# Altium PCB ArduinoSTM32.PcbDoc
Units mm, origin at the board's own origin, x right, y up, seen from the top; angles counter-clockwise.
Board outline 152.4 x 101.6 mm, 2 copper layers (Top Layer, Bottom Layer), stack 0.325 mm thick; 73 components, 61 nets, 247 pads, 39 vias.
Unrouted connection lines stored in the file: 17.
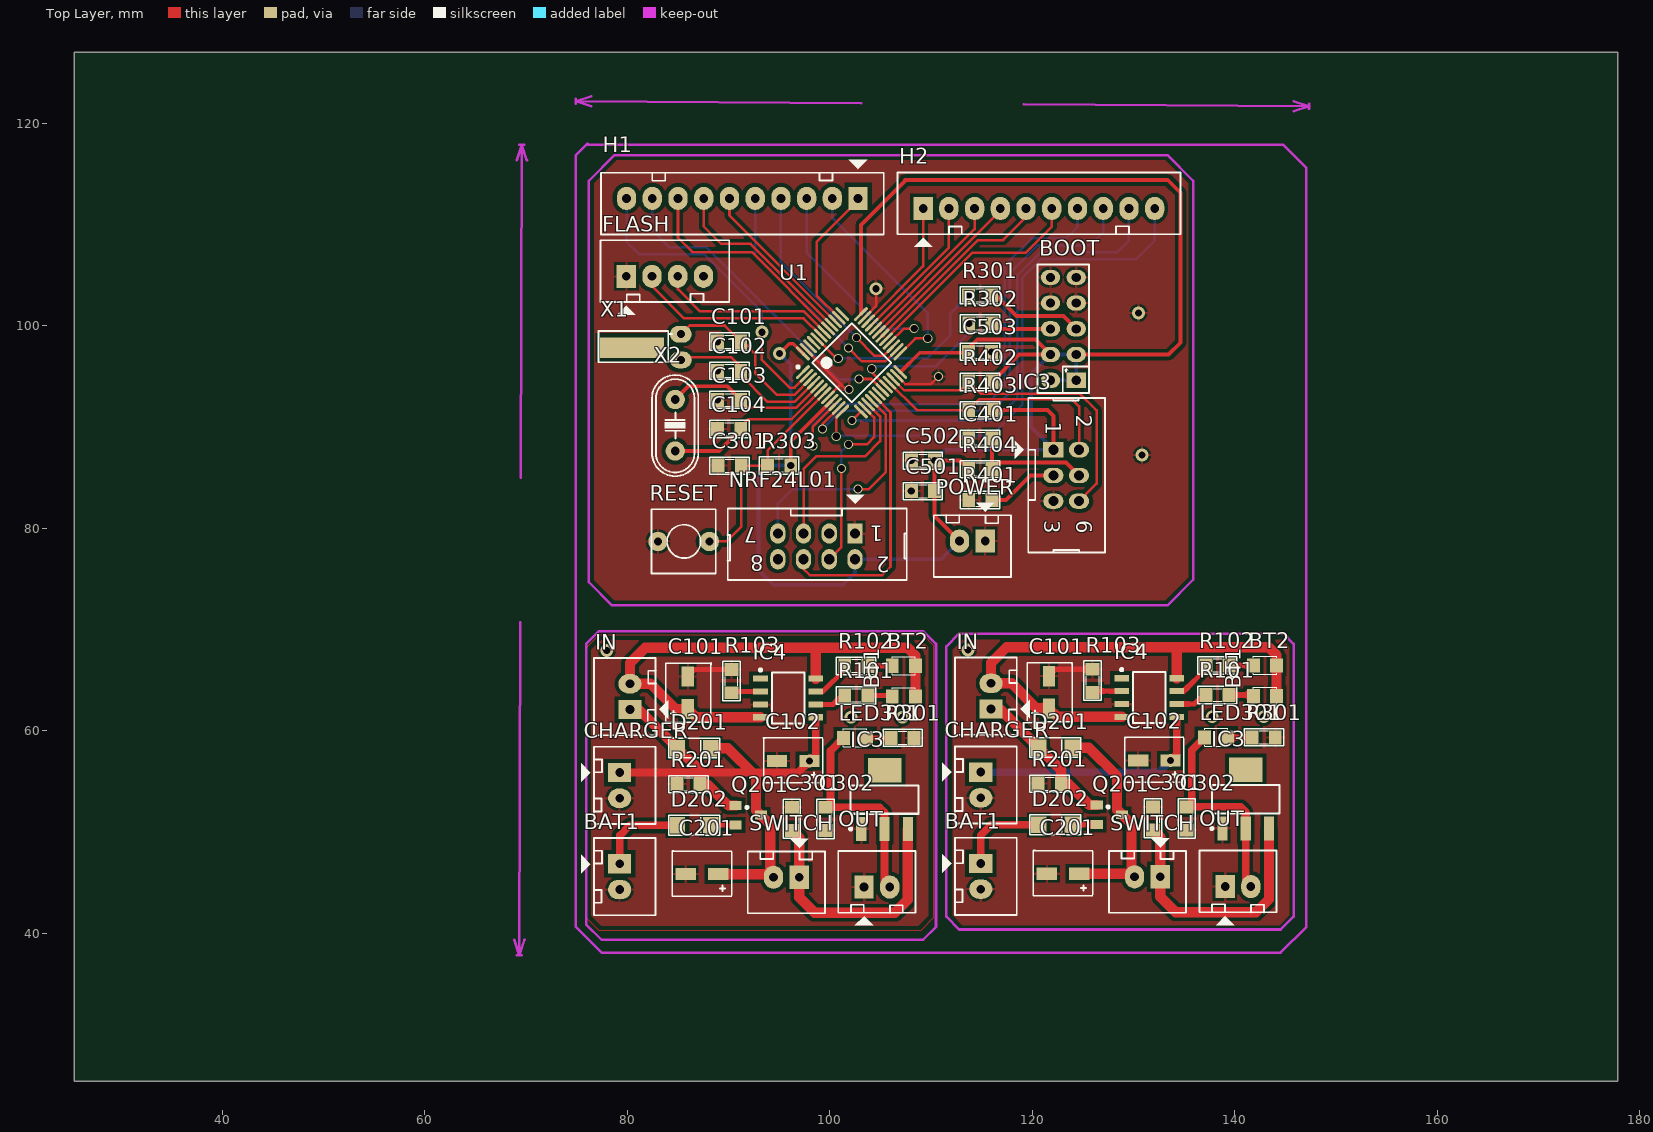
[diagram p0: Top Layer view]
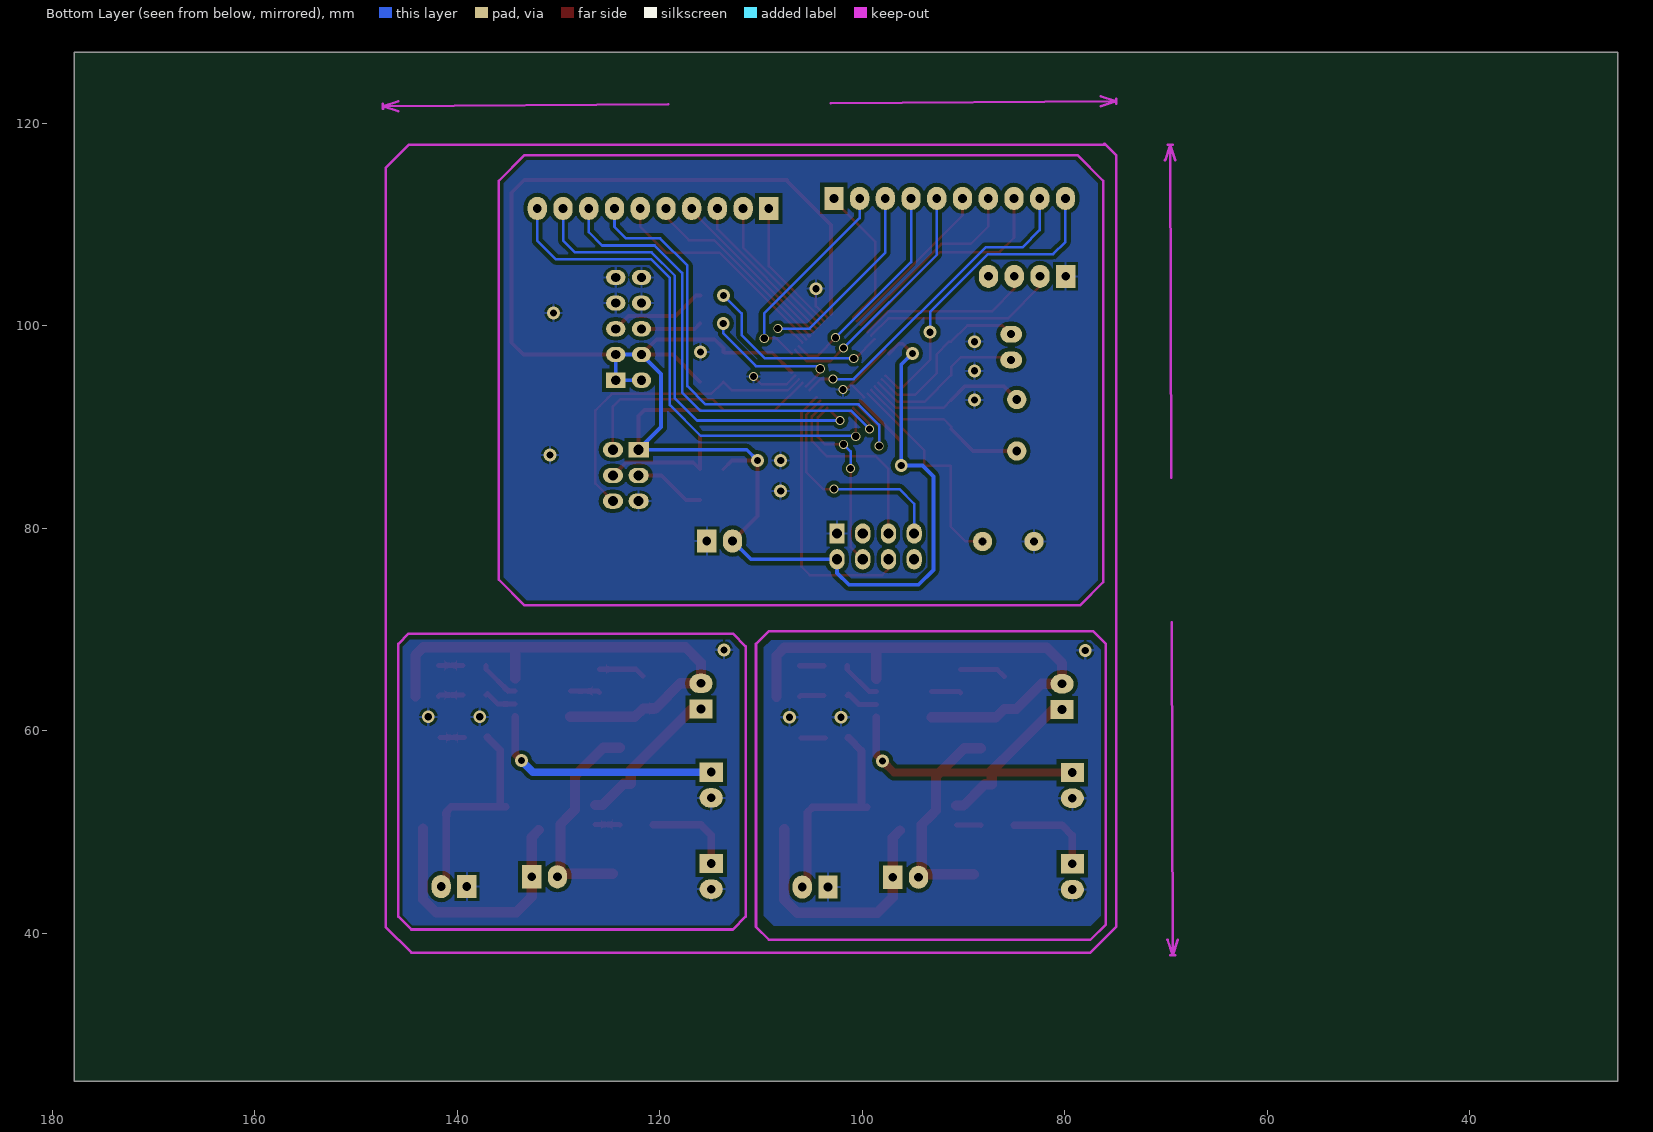
[diagram p1: Bottom Layer view, seen from below]
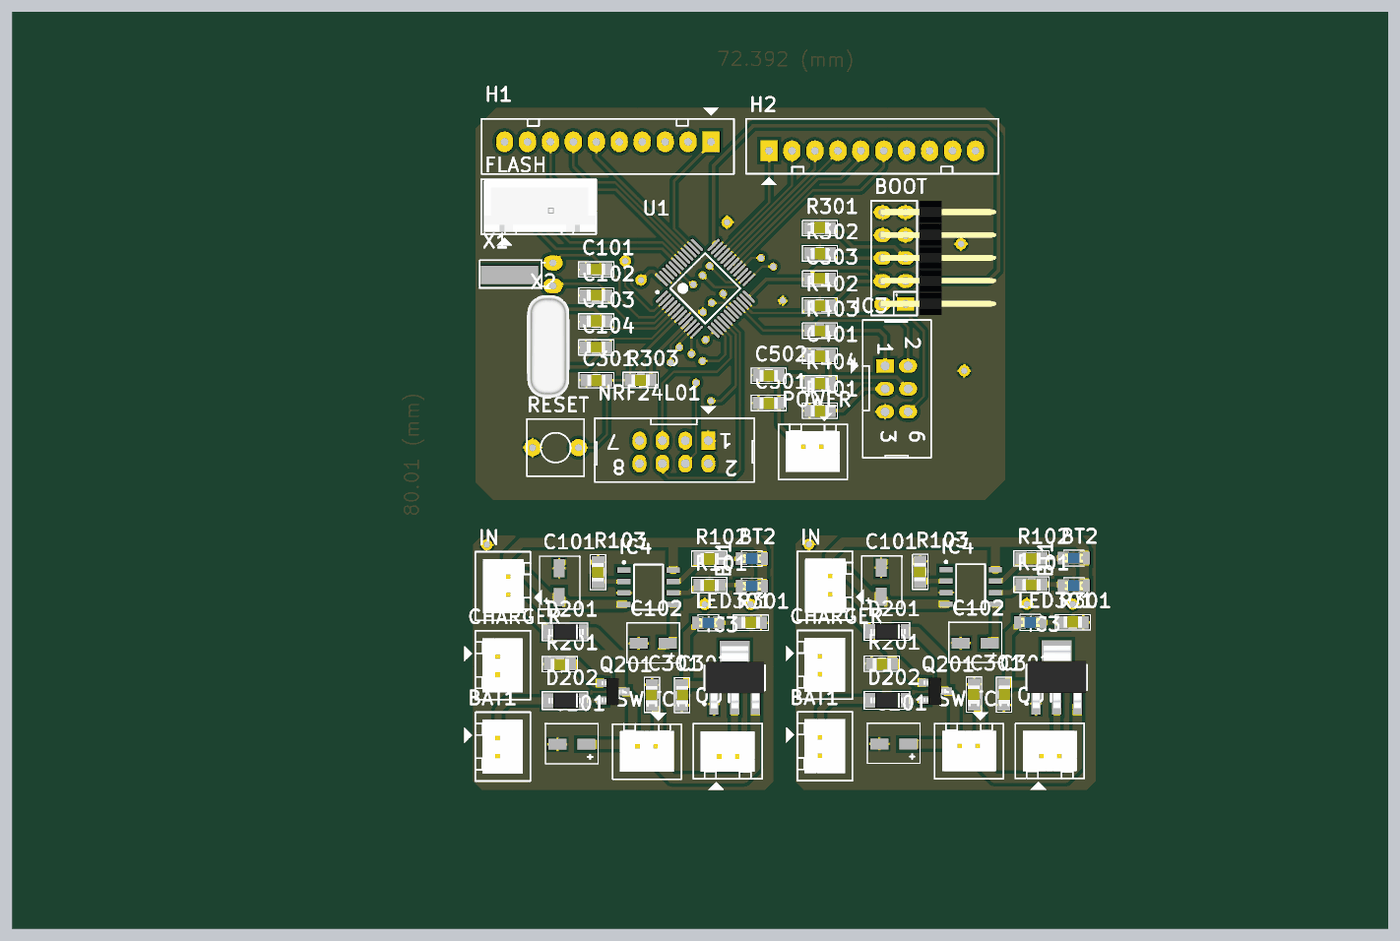
[diagram p2: 3D render of the assembled board from above, using the file's embedded part models]

## Layer stack, top to bottom
Top Layer: signal copper 0.0356
Dielectric 1: core 0.254, FR-4, Dk 4.2
Bottom Layer: signal copper 0.0356

## Board outline
25.4,25.4 177.8,25.4 177.8,127 25.4,127

## Design rules (kind name [scope] priority, off if disabled: settings)
Clearance [All] p1: gap=0.381
PolygonConnect [All] p1: connectstyle=Relief reliefconductorwidth=0.254 reliefentries=4 polygonreliefangle="90 Angle" airgapwidth=0.254
RoutingVias [All] p1: holewidth=0.711 width=1.27 viastyle="Through Hole" minholewidth=0.711 minwidth=1.27 maxholewidth=0.711 maxwidth=1.27
SolderMaskExpansion [All] p1: expansion=0.102
Width VCC_3.3 [InNet('VCC_3.3V')] p1: maxlimit=0.762 minlimit=0.381 preferedwidth=0.762
Width VCC_5 [InNet('VCC_5V')] p2: maxlimit=1.016 minlimit=1.016 preferedwidth=1.016
Width [All] p3: maxlimit=0.381 minlimit=0.254 preferedwidth=0.381
30 further rules are at their usual default settings.

## Components (designator, comment, footprint, x,y, rotation, side; value= is the part's Value field where it differs from the comment)
BAT1 "JP2" CON2 79.248,46.863 r270 top
BAT1 "JP2" CON2 114.907,46.906 r270 top
BOOT "Header 5x2" HED2X5_cen 124.333,94.615 r90 top
BT1 "LED" LED0805-Blue 108.458,63.373 r180 top
BT1 "LED" LED0805-Blue 144.117,63.416 r180 top
BT2 "LED" LED0805-Blue 108.458,66.421 r180 top
BT2 "LED" LED0805-Blue 144.117,66.464 r180 top
C101 "10uF/16V" CAP-B-22UF/16V 85.979,63.754 r90 top
C101 "103" SM-0805 90.068,98.425 r180 top
C101 "10uF/16V" CAP-B-22UF/16V 121.638,63.797 r90 top
C102 "10uF/16V" CAP-B-22UF/16V 96.393,57.023 r180 top
C102 "103" SM-0805 90.068,95.546 r180 top
C102 "10uF/16V" CAP-B-22UF/16V 132.052,57.066 r180 top
C103 "103" SM-0805 90.068,92.668 r180 top
C104 "104" SM-0805 90.068,89.789 r180 top
C201 "10uF/16V" CAP-B-22UF/16V 87.376,45.847 r180 top
C201 "10uF/16V" CAP-B-22UF/16V 123.035,45.89 r180 top
C301 "103" SM-0805 96.266,51.308 r270 top
C301 "103" SM-0805 90.119,86.182 r0 top
C301 "103" SM-0805 131.925,51.351 r270 top
C302 "103" SM-0805 99.568,51.308 r90 top
C302 "103" SM-0805 135.227,51.351 r90 top
C401 "104" SM-0805 114.859,88.862 r0 top
C501 "104" SM-0805 109.195,83.668 r0 top
C502 "104" SM-0805 109.195,86.69 r0 top
C503 "104" SM-0805 114.833,97.409 r180 top
CHARGER "JP2" CON2 79.248,55.88 r270 top
CHARGER "JP2" CON2 114.907,55.923 r270 top
D201 "3V3" Diode1206 86.614,58.293 r0 top
D201 "3V3" Diode1206 122.273,58.336 r0 top
D202 "3V3" Diode1206 86.614,50.673 r0 top
D202 "3V3" Diode1206 122.273,50.716 r0 top
FLASH "JP4" CON4 79.908,104.877 r0 top
H1 "JP10" CON10 102.794,112.573 r180 top
H2 "JP10" CON10 109.22,111.582 r0 top
IC3 "LM1117" SOT223-4N 105.41,53.213 r90 top
IC3 "BH1750" BH1750 122.072,87.757 r270 top
IC3 "LM1117" SOT223-4N 141.069,53.256 r90 top
IC4 "TP4056-1A" TP4056-1A 95.885,63.246 r0 top
IC4 "TP4056-1A" TP4056-1A 131.544,63.289 r0 top
IN "H1" CON2 80.264,62.103 r90 top
IN "H1" CON2 115.923,62.146 r90 top
LED301 "POWER" LED0805-Blue 101.346,59.309 r0 top
LED301 "POWER" LED0805-Blue 137.005,59.352 r0 top
NRF24L01 "NRF24L01" NRF24L01 102.489,79.477 r180 top
OUT "H2" CON2 103.378,44.577 r0 top
OUT "H2" CON2 139.037,44.62 r0 top
POWER "JP2" CON2 115.341,78.74 r180 top
Q201 "IRF9540" SOT23A 91.948,51.689 r270 top
Q201 "IRF9540" SOT23A 127.607,51.732 r270 top
R101 "330" SM-0805 102.616,63.5 r0 top
R101 "330" SM-0805 138.275,63.543 r0 top
R102 "330" SM-0805 102.616,66.421 r0 top
R102 "330" SM-0805 138.275,66.464 r0 top
R103 "1k" SM-0805 90.297,64.897 r270 top
R103 "1k" SM-0805 125.956,64.94 r270 top
R201 "10K" SM-0805 86.055,54.737 r0 top
R201 "10K" SM-0805 121.714,54.78 r0 top
R301 "330" SM-0805 107.188,59.309 r180 top
R301 "100k" SM-0805 114.833,102.997 r180 top
R301 "330" SM-0805 142.847,59.352 r180 top
R302 "100k" SM-0805 114.859,100.228 r0 top
R303 "1k" SM-0805 94.996,86.208 r0 top
R401 "1k" SM-0805 114.859,82.804 r0 top
R402 "4.7k" SM-0805 114.859,94.463 r0 top
R403 "4.7k" SM-0805 114.859,91.675 r0 top
R404 "1k" SM-0805 114.859,85.833 r0 top
RESET "SW" SW2 88.113,78.702 r180 top
SWITCH "JP2" CON2 96.977,45.542 r180 top
SWITCH "JP2" CON2 132.636,45.585 r180 top
U1 "STM32F103C8T6" TQFP48_N 102.159,96.342 r45 top
X1 "32.768Khz" XT32kn 85.293,99.162 r180 top
X2 "4Mhz" XT2 84.734,90.17 r90 top

## Footprints (in the part's own frame and the unit in brackets; to place one, negate y for a bottom-side part, rotate by r counter-clockwise, add the part's x,y. Pads: shape width x height; smd on the part's side, far side on the other; paste and mask are expansions set on the pad)
BH1750 [mm] "BH1750 3x2,20 pin, connecter"
  rect 1.5x2 hole 1: 1(0,0)
  oval 1.5x2 hole 1: 2(2.54,0) 3(5.08,0) 4(0,2.54) 5(2.54,2.54) 6(5.08,2.54)
  silkscreen extent -5.1,-3.81 10.16,5.1
CAP-B-22UF/16V [mm]
  rect 2x1.2 smd: 1(-1.6,0) 2(1.6,0)
  silkscreen extent -2.92,-2.29 2.92,2.16
CON2 [mil] "CON2"
  rect 75x90 hole 34: 1(0,0)
  oval 75x90 hole 34: 2(100,0)
  silkscreen extent -100,-150 200,140, body extent -68,-70 168,107, height 236
CON4 [mil] "CON4"
  rect 75x90 hole 34: 1(0,0)
  oval 75x90 hole 34: 2(100,0) 3(200,0) 4(300,0)
  silkscreen extent -100,-150 400,140, body extent -90,-90 398,136, height 276
CON10 [mil] "CON10"
  rect 75x90 hole 34: 1(0,0)
  oval 75x90 hole 34: 2(100,0) 3(200,0) 4(300,0) 5(400,0) 6(500,0) 7(600,0) 8(700,0) 9(800,0) 10(900,0)
  silkscreen extent -100,-150 1000,140
Diode1206 [mil]
  rect 60x65 smd: 1(-65,0) 2(65,0)
  silkscreen extent -99,-38 99,39, body extent -72,-35 82,35, height 46
HED2X5_cen [mm] "Connector; Header; 5x2 Position"
  rect 1.5x1.9 hole 0.9: 1(0,0)
  oval 1.5x1.9 hole 0.9: 2(2.54,0) 3(5.08,0) 4(7.62,0) 5(10.16,0) 6(0,2.54) 7(2.54,2.54) 8(5.08,2.54) 9(7.62,2.54) 10(10.16,2.54)
  silkscreen extent -1.27,-1.27 11.43,3.81, body extent -1.24,-10.02 11.46,2.86, height 5.02
LED0805-Blue [mil]
  rect 50x55 smd: 1(0,0) 2(90,0)
  silkscreen extent 0,-35 90,35, body extent 5,-25 85,25, height 43
NRF24L01 [mm] "NRF24L01 4x2 pin, connector"
  rect 1.5x2 hole 1: 1(0,0)
  oval 1.5x2 hole 1: 2(0,2.54) 3(2.54,0) 4(2.54,2.54) 5(5.08,0) 6(5.08,2.54) 7(7.62,0) 8(7.62,2.54)
  silkscreen extent -5.1,-3.81 12.6,4.57
SM-0805 [mil] "Compoment SMD 80x50mil"
  rect 50x55 smd: 1(-45,0) 2(45,0)
  silkscreen extent -77,-34 76,33, body extent -40,-27 40,23, height 24
SOT23A [mm] "SOT 23A"
  rect 0.85x1.2 smd: 1(-0.94,-1.245) 2(0.005,1.25) 3(0.985,-1.25)
  silkscreen extent -0.88,-0.25 -0.64,0, body extent -1.5,-1.3 1.5,1.2, height 1.06
SOT223-4N [mm] "SOT223, 4-Leads, Body 6.5x3.5mm, Pitch 2.3mm, Lead Span 7mm, IPC Medium Density"
  rect 2.4x1 smd: 1(-2.9,2.3) 2(-2.9,0) 3(-2.9,-2.3)
  rect 2.4x3.3 smd: 4(2.9,0)
  silkscreen extent -3.02,-3.35 1.4,3.47, body extent -3.39,-3.27 3.5,3.23, height 1.72
SW2 [mil] "SW button 2pin, 250x 250 mil"
  round 75 hole 31: 1(0,0) 2(200,0)
  silkscreen extent -25,-125 225,125
TP4056-1A [mm] "TP4056-1A, 8-Leads, Body 4.90x3.90mm, Pitch 1.27mm, IPC Medium Density"
  rect 1.45x0.6 smd: 1(-2.725,1.905) 2(-2.725,0.635) 3(-2.725,-0.635) 4(-2.725,-1.905) 5(2.725,-1.905) 6(2.725,-0.635) 7(2.725,0.635) 8(2.725,1.905)
  silkscreen extent -2.85,-2.5 1.6,2.88, body extent -2,-2.5 2,2.5, height 1.75
TQFP48_N [mm] "Thin QFP, 48-Leads, Body 7x7mm, Pitch 0.5mm, IPC Medium Density"
  oval 1.8x0.3 smd: 1(-4.05,2.75) 2(-4.05,2.25) 3(-4.05,1.75) 4(-4.05,1.25) 5(-4.05,0.75) 6(-4.05,0.25) 7(-4.05,-0.25) 8(-4.05,-0.75) 9(-4.05,-1.25) 10(-4.05,-1.75) 11(-4.05,-2.25) 12(-4.05,-2.75) 25(4.05,-2.75) 26(4.05,-2.25) 27(4.05,-1.75) 28(4.05,-1.25) 29(4.05,-0.75) 30(4.05,-0.25) 31(4.05,0.25) 32(4.05,0.75) 33(4.05,1.25) 34(4.05,1.75) 35(4.05,2.25) 36(4.05,2.75)
  oval 0.3x1.8 smd: 13(-2.75,-4.05) 14(-2.25,-4.05) 15(-1.75,-4.05) 16(-1.25,-4.05) 17(-0.75,-4.05) 18(-0.25,-4.05) 19(0.25,-4.05) 20(0.75,-4.05) 21(1.25,-4.05) 22(1.75,-4.05) 23(2.25,-4.05) 24(2.75,-4.05) 37(2.75,4.05) 38(2.25,4.05) 39(1.75,4.05) 40(1.25,4.05) 41(0.75,4.05) 42(0.25,4.05) 43(-0.25,4.05) 44(-0.75,4.05) 45(-1.25,4.05) 46(-1.75,4.05) 47(-2.25,4.05) 48(-2.75,4.05)
  silkscreen extent -4.17,-2.75 2.75,3.57, body extent -3.5,-3.5 3.5,3.5, height 1.2
XT2 [mil] "Footpin for Crystal 2 pin"
  round 75 hole 34: 1(-100,0) 2(100,0)
  silkscreen extent -198,-90 195,90, body extent -233,-93 213,90, height 138
XT32kn [mil] "Crystal for 32,768kHz, 2pin"
  oval 85x65 hole 31: 1(0,0) 2(0,100)
  rect 250x80 smd: 3(190,52)
  silkscreen extent 34,-12 320,109

## Part data
BAT1 BAT1 CHARGER CHARGER POWER SWITCH SWITCH: library part Con2, "Connector 2"
BOOT: library part HED5x2
BT1 BT1 BT2 BT2: "LED Single colour Green and Red"
C101 C101 C102 C102 C201 C201: library part CP3, "Cap 100uF/35V - 470uF/16V"
C101 C102 C103 C104 C301 C301 C301 C302 C302: library part CM, "Cap SMD"
C401 C501 C502 C503: library part CN2, "Cap np 104 => 105pF"
D201 D201 D202 D202: library part DZ, "Diode Zenner"
FLASH: library part Con4, "Connector 4"
H1 H2: library part Con10, "Connector 10"
IC3 IC3: "3v3"
IN IN OUT OUT: library part Hed2, "Header 2 (Green)"
LED301 LED301: library part LED, "LED Single colour Green and Red"
Q201 Q201: "HEXFET P-Channel Power MOSFET"
R101 R101 R102 R102 R103 R103 R201 R201 R301 R301 R301 R302 R303 R401 R402 R403 R404: library part R, "Resistor 1/4W"
RESET: library part SW2, "Switch button 2 pin"
U1: "STM32 ARM-based 32-bit MCU with 64 Kbytes Flash, 48-pin LQFP, Industrial Temperature"
X1 X2: library part XT2, "Crystal For all Crystal 2pin."

## Via types
v1: diameter 1.27, hole 0.711, Top Layer to Bottom Layer, 23 vias
v2: diameter 0.9, hole 0.711, Top Layer to Bottom Layer, 15 vias
v3: diameter 0.9/0.9 (per signal layer), hole 0.711, Top Layer to Bottom Layer, 1 vias

## Nets (pads, with @x,y where several pads share a name; then routed paths per layer and width w, separated by ;. In a path a pad name is that pad's centre, name@x,y a point inside that pad or via, vN(x,y) a via of type N, cw(c..) or ccw(c..) an arc to the next point about the centre after c; other vN are vias at no path point)
A0: H2.7 U1.10 | length 50.1
  Top Layer w0.254: v2(98.323,88.138) 98.323,90.032 U1.10
  Bottom Layer w0.254: v2(98.323,88.138) 98.331,88.145 98.331,90.211 100.352,92.233 115.474,92.233 117.272,94.031 117.272,105.943 119.964,108.636 123.342,108.636 124.46,109.753 H2.7
A1: H2.8 U1.11 | length 47.7
  Top Layer w0.254: v2(99.289,89.814) 99.289,90.29 U1.11
  Bottom Layer w0.254: v2(99.289,89.814) 101.072,91.598 115.957,91.598 117.78,93.421 117.78,105.207 120.498,107.925 125.679,107.925 127,109.245 H2.8
A2: H2.10 U1.12 | length 52.8
  Top Layer w0.254: v2@100.584,89.027 v2(100.635,89.078) 100.635,90.929 U1.12
  Bottom Layer w0.254: v2(100.635,89.078) 100.678,89.121 115.944,89.121 118.999,92.177 118.999,104.724 120.828,106.553 130.251,106.553 132.08,108.382 H2.10
A3: H2.9 U1.13 | length 46.2
  Top Layer w0.254: v2(102.184,90.64) U1.13
  Bottom Layer w0.254: v2(102.184,90.64) 116.294,90.64 118.491,92.837 118.491,104.935 120.795,107.239 128.346,107.239 129.54,108.433 H2.9
A8: H2.6 U1.29 | length 22.8
  Top Layer w0.254: U1.29 114.091,107.213 119.355,107.213 121.92,109.779 H2.6
A9: H2.5 U1.30 | length 20
  Top Layer w0.254: U1.30 114.628,108.458 117.119,108.458 119.38,110.719 H2.5
  Top Layer w0.381: U1.30 U1.30@105.278,99.029
A10: H2.4 U1.31 | length 17.2
  Top Layer w0.254: U1.31 116.84,111.377 H2.4
A11: H2.3 U1.32 | length 15.9
  Top Layer w0.254: U1.32 114.3,109.544 H2.3
A12: H2.2 U1.33 | length 14.6
  Top Layer w0.254: U1.33 111.76,107.711 H2.2
A13: H2.1 U1.34 | length 13.4
  Top Layer w0.254: U1.34 109.22,105.878 H2.1
A14: U1.37
A15: H1.1 U1.38 | length 14.4
  Top Layer w0.254: U1.38 98.704,102.979 98.704,108.255 102.794,112.344 H1.1
B0: U1.18
B1: H1.9 U1.19 | length 32.4
  Top Layer w0.254: v2(102.87,94.742) 104.113,94.742 U1.19
  Bottom Layer w0.254: H1.9 82.474,109.449 84.176,107.747 87.812,107.747 100.838,94.721 102.849,94.721 v2(102.87,94.742)
B3: H1.6 U1.39 | length 16.5
  Top Layer w0.254: H1.6 90.094,110.882 U1.39
B4: H1.7 U1.40 | length 19.4
  Top Layer w0.254: H1.7 87.554,109.804 89.281,108.077 92.192,108.077 U1.40
B5: H1.8 U1.41 | length 22.4
  Top Layer w0.254: H1.8 85.014,108.687 86.436,107.264 92.297,107.264 U1.41
B8: U1.45
B9: U1.46
B12: H1.2 U1.25 | length 21.3
  Top Layer w0.254: U1.25 108.461,98.755 v2(109.677,98.755) v2@109.525,98.603
  Bottom Layer w0.254: H1.2 100.254,110.617 109.677,101.194 v2(109.677,98.755)
B13: H1.5 U1.26 | length 24.4
  Top Layer w0.254: v2(101.854,97.79) 103.149,96.495 105.493,96.495 U1.26
  Bottom Layer w0.254: H1.5 92.634,107.01 v2(101.854,97.79)
B14: H1.4 U1.27 | length 21.6
  Top Layer w0.254: v2(102.633,98.823) 104.428,97.028 105.319,97.028 U1.27
  Bottom Layer w0.254: H1.4 95.174,106.282 v2(102.633,98.823)
B15: H1.3 U1.28 | length 22.1
  Top Layer w0.254: U1.28 107.305,99.72 v2(108.331,99.72)
  Bottom Layer w0.254: H1.3 97.714,107.213 105.207,99.72 v2(108.331,99.72)
BAT: BAT1.1 D202.1 | length 17.9
  Top Layer w0.762: BAT1.1@79.248,46.863 79.248,49.657 80.264,50.673 D202.1@84.963,50.673 ; BAT1.1@114.907,46.906 114.907,49.7 115.923,50.716 D202.1@120.622,50.716
BAT+: C102.1@97.993,57.023 C102.1@133.652,57.066 CHARGER.1 IC4.5 | length 47.6
  Top Layer w0.762: CHARGER.1@79.248,55.88 96.85,55.88 v1(97.993,57.023) 98.61,57.64 IC4.5@98.61,61.341 ; v1(133.652,57.066) 134.269,57.683 IC4.5@134.269,61.384
  Bottom Layer w0.762: CHARGER.1@114.907,55.923 132.509,55.923 v1(133.652,57.066)
BOOT0: BOOT.3 R301.1@115.976,102.997 | length 9.7
  Top Layer w0.381: R301.1@115.976,102.997 116.408,102.997 118.44,100.965 123.063,100.965 BOOT.3
BOOT1: BOOT.8 R302.2 | length 6
  Top Layer w0.381: R302.2 116.535,99.695 BOOT.8
C13: H1.10 U1.2 | length 31.4
  Top Layer w0.254: v1@93.37,99.365 v1(93.294,99.365) 93.294,96.622 96.037,93.878 96.513,93.878 U1.2
  Bottom Layer w0.254: H1.10 79.934,108.28 81.153,107.061 87.6,107.061 93.294,101.367 v1(93.294,99.365)
CE: NRF24L01.3
CNS: NRF24L01.4 U1.14 | length 18.2
  Top Layer w0.254: NRF24L01.4 101.143,78.13 v3(101.143,85.903) ; v2(101.854,88.29) 103.657,88.29 104.369,89.002 104.369,90.95 U1.14
  Bottom Layer w0.254: v3(101.143,85.903) 101.143,87.579 v2(101.854,88.29)
GND: BAT1.2 BOOT.4 BOOT.5 BOOT.9 BOOT.10 C101.2 C102.2 C103.2 C104.2 C201.2 C301.1 C302.1 C401.1 C501.1 C502.1 C503.1 CHARGER.2 FLASH.1 IC3.1@103.11,50.313 IC3.1@138.769,50.356 IC3.3@122.072,82.677 IC4.3 NRF24L01.1 OUT.1 POWER.1 R103.1 R201.1 R301.1@108.331,59.309 R301.1@143.99,59.352 R401.1 RESET.2 U1.8 U1.23 U1.35 U1.47 | length 25
  Top Layer w0.254: U1.47 101.067,94.252 ; U1.8 101.067,94.189 101.067,94.252 ; v2(101.905,93.701) 101.618,93.701 101.067,94.252 ; U1.35 104.572,101.937 v1(104.572,103.657) ; U1.23 107.449,94.234 109.982,94.234 v2(110.744,94.996)
  Top Layer w0.508: C101.2@85.979,65.354 86.665,66.04 R103.1@90.297,66.04 ; C101.2@121.638,65.397 122.324,66.083 R103.1@125.956,66.083
  other v1: 102.108,61.341 107.188,61.341 137.767,61.384 142.847,61.384 77.978,67.945 113.637,67.988 108.052,83.668 108.052,86.69 130.835,87.224 88.925,92.668 88.925,95.546 115.976,97.409 88.925,98.425 130.48,101.27
MISO: NRF24L01.7 U1.16 | length 22.5
  Top Layer w0.254: v2(102.794,83.871) 103.861,83.871 105.512,85.522 105.512,91.222 U1.16
  Bottom Layer w0.254: NRF24L01.7 94.869,82.423 96.317,83.871 v2(102.794,83.871)
MOSI: NRF24L01.6 U1.17 | length 27.5
  Top Layer w0.254: NRF24L01.6 97.409,75.997 98.044,75.362 105.156,75.362 105.994,76.2 105.994,91.446 U1.17
NetBT1_2: BT1.2 R101.2 | length 4.9
  Top Layer w0.508: R101.2@103.759,63.5 106.045,63.5 BT1.2@106.172,63.373 ; R101.2@139.418,63.543 141.704,63.543 BT1.2@141.831,63.416
NetBT2_2: BT2.2 R102.2 | length 4.8
  Top Layer w0.508: R102.2@103.759,66.421 BT2.2@106.172,66.421 ; R102.2@139.418,66.464 BT2.2@141.831,66.464
NetC101_1: C101.1@91.211,98.425 U1.3 X1.1 | length 17.7
  Top Layer w0.254: X1.1 86.157,100.025 89.611,100.025 91.211,98.425 91.415,98.425 92.659,97.18 92.659,95.301 94.793,93.167 96.509,93.167 U1.3
NetC102_1: C102.1@91.211,95.546 U1.4 X1.2 | length 16.3
  Top Layer w0.254: X1.2 85.547,96.876 90.272,96.876 91.211,95.936 91.211,95.546 91.211,95.123 93.853,92.481 96.53,92.481 U1.4
NetC401_2: C401.2 IC3.5 R404.2 | length 12.7
  Top Layer w0.381: C401.2@116.002,89.104 C401.2 R404.2 116.681,86.512 123.317,86.512 IC3.5
NetD202_2: D202.2 Q201.3 | length 4.9
  Top Layer w0.508: D202.2@88.265,50.673 88.296,50.704 Q201.3@90.698,50.704 ; D202.2@123.924,50.716 123.954,50.747 Q201.3@126.357,50.747
NetIC3_2: IC3.2@122.072,85.217 R401.2 | length 7.1
  Top Layer w0.381: R401.2 117.399,82.804 119.812,85.217 IC3.2@122.072,85.217
NetIC4_2: IC4.2 R103.2 | length 5.8
  Top Layer w0.508: R103.2@90.297,63.754 90.424,63.881 IC4.2@93.16,63.881 ; R103.2@125.956,63.797 126.083,63.924 IC4.2@128.819,63.924
NetIC4_6: IC4.6 R101.1 | length 6.7
  Top Layer w0.508: IC4.6@98.61,62.611 100.33,62.611 101.346,63.627 R101.1@101.473,63.5 ; IC4.6@134.269,62.654 135.989,62.654 137.005,63.67 R101.1@137.132,63.543
NetIC4_7: IC4.7 R102.1 | length 8.3
  Top Layer w0.508: IC4.7@98.61,63.881 99.314,63.881 101.473,66.04 R102.1@101.473,66.421 ; IC4.7@134.269,63.924 134.973,63.924 137.132,66.083 R102.1@137.132,66.464
NetLED301_2: LED301.2 R301.2@106.045,59.309 R301.2@141.704,59.352 | length 4.8
  Top Layer w0.508: LED301.2@103.632,59.309 R301.2@106.045,59.309 ; LED301.2@139.291,59.352 R301.2@141.704,59.352
NetR301_2: R301.2@113.69,102.997 U1.44 | length 19.8
  Top Layer w0.254: U1.44 100.666,96.774 v2(100.838,96.774) v2@100.838,96.495
  Bottom Layer w0.254: v2(100.838,96.774) 109.601,96.774 111.912,99.085 111.912,101.219 v1(113.69,102.997)
NetR302_1: R302.1 U1.20 | length 14.3
  Top Layer w0.254: v2(104.14,95.758) 104.14,95.422 U1.20
  Bottom Layer w0.254: v2(104.14,95.758) 104.394,96.012 110.49,96.012 113.716,99.238 v1(113.716,100.228)
OSC1: C103.1 U1.5 X2.2 | length 16.3
  Top Layer w0.254: C103.1 91.982,91.897 96.653,91.897 U1.5
  Top Layer w0.381: X2.2 86.055,94.031 89.848,94.031 C103.1
OSC2: C104.1 U1.6 X2.1 | length 17
  Top Layer w0.254: C104.1 91.211,90.043 91.948,90.78 96.243,90.78 U1.6
  Top Layer w0.381: X2.1 89.052,87.63 C104.1
RESET: C301.2@91.262,86.182 R303.1 RESET.1 U1.7 | length 21.8
  Top Layer w0.254: RESET.1 89.802,78.702 91.262,80.162 91.262,86.182 R303.1@93.828,86.182 ; R303.1 93.853,87.683 U1.7
RRX: FLASH.2 U1.43 | length 19.7
  Top Layer w0.254: FLASH.2 82.448,103.911 85.623,100.736 97.411,100.736 U1.43
RTX: FLASH.3 U1.42 | length 17.5
  Top Layer w0.254: FLASH.3 84.988,103.607 87.147,101.448 97.407,101.448 U1.42
SCK: NRF24L01.5 U1.15 | length 19.3
  Top Layer w0.254: NRF24L01.5@97.536,79.477 NRF24L01.5 97.409,85.852 98.654,87.097 103.454,87.097 104.978,88.621 104.978,91.048 U1.15
SCL: IC3.4@124.612,87.757 R403.1 U1.21 | length 24.8
  Top Layer w0.254: U1.21 108.594,91.675 R403.1 114.795,92.754 123.882,92.754 124.612,92.024 IC3.4@124.612,87.757
SDA: IC3.6 R402.1 U1.22 | length 31.7
  Top Layer w0.254: U1.22 107.351,93.624 112.878,93.624 R402.1 114.91,93.269 124.714,93.269 125.12,92.862 125.933,92.05 126.34,91.643 126.34,84.404 IC3.6
VCC: 
VCC_3.3V: BOOT.1 BOOT.2 BOOT.6 BOOT.7 C302.2 C501.2 C502.2 C503.2 IC3.1@122.072,87.757 IC3.2@105.41,50.313 IC3.2@141.069,50.356 LED301.1 NRF24L01.2 POWER.2 R303.2 R402.2 R403.2 R404.1 U1.9 U1.24 U1.36 U1.48 | length 246.1
  Top Layer w0.381: v1@94.996,97.307 v1(95.042,97.261) 96.002,98.222 96.39,98.222 U1.48 ; v1(96.139,86.208) 96.139,88.555 U1.9 ; U1.36 103.078,109.936 107.442,114.3 107.442,114.376 133.375,114.376 134.62,113.132 134.62,98.323 133.452,97.155 BOOT.2 ; U1.24 108.877,97.333 113.614,97.333 C503.2 113.69,97.79 114.554,98.654 120.294,98.654 BOOT.7 118.694,97.155 R402.2 ; POWER.2 110.338,81.204 C501.2 v1(110.338,86.69) 112.859,86.69 R404.1 ; R403.2 121.482,91.675 122.072,91.084 IC3.1@122.072,87.757
  Top Layer w0.762: C302.2@99.568,52.451 104.902,52.451 105.41,51.943 105.41,50.313 105.41,45.085 105.918,44.577 ; C302.2@100.076,52.451 100.076,58.039 LED301.1@101.346,59.309 ; C302.2@135.227,52.494 140.561,52.494 141.069,51.986 141.069,50.356 141.069,45.128 141.577,44.62 ; C302.2@135.735,52.494 135.735,58.082 LED301.1@137.005,59.352
  Bottom Layer w0.381: v1(95.042,97.261) 96.139,96.164 v1(96.139,86.208) 94.056,86.208 92.964,85.115 92.964,75.895 94.437,74.422 101.321,74.422 102.489,75.59 NRF24L01.2 110.998,76.937 POWER.2 ; v1(110.338,86.69) 111.404,87.757 122.072,87.757 122.072,87.782 119.863,89.992 119.863,95.225 BOOT.7 BOOT.2 BOOT.1 BOOT.6
VCC_5V: FLASH.4
VCC_5V1: C201.1 D201.2 Q201.2 SWITCH.2 | length 42.9
  Top Layer w1.016: D201.2@88.265,58.293 89.916,58.293 92.71,55.499 92.71,52.172 93.198,51.684 94.132,50.75 SWITCH.2@94.132,45.847 ; C201.1@88.976,45.847 SWITCH.2@94.132,45.847 ; SWITCH.2@94.437,45.542 SWITCH.2@94.132,45.847 ; D201.2@123.924,58.336 125.575,58.336 128.369,55.542 128.369,52.215 128.857,51.727 129.791,50.793 SWITCH.2@129.791,45.89 ; C201.1@124.635,45.89 SWITCH.2@129.791,45.89 ; SWITCH.2@130.096,45.585 SWITCH.2@129.791,45.89
VCC_5V2: C301.2@96.266,50.165 C301.2@131.925,50.208 IC3.3@107.71,50.313 IC3.3@143.369,50.356 SWITCH.1 | length 51.6
  Top Layer w1.016: C301.2@96.266,50.165 96.977,49.454 96.977,45.542 96.977,43.561 98.501,42.037 106.426,42.037 107.71,43.321 IC3.3@107.71,50.313 ; C301.2@131.925,50.208 132.636,49.497 132.636,45.585 132.636,43.604 134.16,42.08 142.085,42.08 143.369,43.364 IC3.3@143.369,50.356
VCC_SOON: BT1.1 BT2.1 C101.1@85.979,62.154 C101.1@121.638,62.197 IC4.4 IC4.8 IN.2 | length 105.1
  Top Layer w1.016: IC4.4@93.16,61.341 86.792,61.341 85.979,62.154 84.785,62.154 82.296,64.643 80.264,64.643 80.264,66.675 81.788,68.199 98.552,68.199 ; IC4.8@98.61,65.151 98.61,68.141 98.552,68.199 ; BT1.1@108.458,63.373 108.458,66.421 108.458,67.437 107.696,68.199 98.552,68.199 ; IC4.4@128.819,61.384 122.451,61.384 121.638,62.197 120.444,62.197 117.955,64.686 115.923,64.686 115.923,66.718 117.447,68.242 134.211,68.242 ; IC4.8@134.269,65.194 134.269,68.184 134.211,68.242 ; BT1.1@144.117,63.416 144.117,66.464 144.117,67.48 143.355,68.242 134.211,68.242
VCC_SOON1: D201.1 IN.1 Q201.1 R201.2 | length 30.3
  Top Layer w1.016: IN.1@80.264,62.103 81.153,62.103 84.963,58.293 87.198,56.058 87.198,54.737 87.884,54.737 89.992,52.629 Q201.1@90.703,52.629 ; IN.1@115.923,62.146 116.812,62.146 120.622,58.336 122.857,56.101 122.857,54.78 123.543,54.78 125.651,52.672 Q201.1@126.362,52.672
pads on no net: IC3.4@105.41,56.113 IC3.4@141.069,56.156 IC4.1 NRF24L01.8 OUT.2 U1.1 X1.3

## Polygon pours and split planes (outlines as drawn)
GND on Bottom Layer "Keep-Out Layer-No Net" (solid, pour order 24): 133.35,116.84 135.89,114.3 135.89,75.159 135.865,75.133 133.35,72.619 133.35,72.39 78.664,72.39 76.378,74.676 76.2,74.676 76.2,114.3 78.74,116.84
GND on Bottom Layer "Keep-Out Layer-No Net" (solid, pour order 36): 112.875,69.512 144.879,69.512 145.895,68.496 145.895,41.572 144.625,40.302 112.875,40.302 111.605,41.572 111.605,68.242
GND on Top Layer "Keep-Out Layer-No Net" (solid, pour order 32): 77.216,69.469 109.22,69.469 110.236,68.453 110.236,41.529 108.966,40.259 77.216,40.259 75.946,41.529 75.946,68.199
GND on Top Layer "Keep-Out Layer-No Net" (solid, pour order 30): 77.216,69.469 75.946,68.199 75.946,41.529 77.216,40.259 108.966,40.259 110.236,41.529 110.236,68.453 109.22,69.469
GND on Top Layer "Keep-Out Layer-No Net" (solid, pour order 28): 133.35,116.84 135.89,114.3 135.89,74.93 133.35,72.39 78.486,72.39 76.2,74.676 76.2,114.3 78.74,116.84
GND on Top Layer "Keep-Out Layer-No Net" (solid, pour order 34): 112.875,69.512 111.605,68.242 111.605,41.572 112.875,40.302 144.625,40.302 145.895,41.572 145.895,68.496 144.879,69.512

## Keep-outs
Keep-Out Layer:
  lines w0.254: 68.839,39.372 69.342,37.846 ; 69.083,116.334 69.596,117.856 ; 69.088,37.847 69.596,37.845 ; 69.342,117.857 69.85,117.855 ; 69.446,70.716 69.342,37.846 ; 69.492,84.986 69.596,117.856 ; 69.855,39.368 69.342,37.846 ; 70.099,116.33 69.596,117.856 ; 74.928,121.92 74.932,122.428 ; 75.946,117.856 144.78,117.856 147.066,115.57 147.066,40.64 144.526,38.1 77.47,38.1 74.93,40.64 74.93,116.84 76.073,117.983 ; 76.45,121.655 74.93,122.174 ; 76.458,122.671 74.93,122.174 ; 103.101,121.976 74.93,122.174 ; 119.149,121.864 147.32,121.666 ; 145.792,121.169 147.32,121.666 ; 145.8,122.185 147.32,121.666 ; 147.318,121.412 147.322,121.92 ; 75.946,40.894 75.946,68.58 77.216,69.85 77.47,69.85 109.22,69.85 110.49,68.58 110.49,40.64 109.22,39.37 77.47,39.37 75.946,40.894 ; 76.2,74.676 76.2,114.3 78.74,116.84 133.35,116.84 135.89,114.3 135.89,74.93 133.35,72.39 78.486,72.39 76.2,74.676 ; 111.506,41.656 111.506,68.326 112.776,69.596 144.78,69.596 145.796,68.58 145.796,41.656 144.526,40.386 112.776,40.386 111.506,41.656
  text "72.392 (mm)" at 103.349,121.06 h1.52 r359.6
  text "80.01 (mm)" at 70.361,70.967 h1.52 r89.82

## Text inside footprints (layer, text, board x,y; h text height)
IC3: Top Overlay "1" at 121.322,90.532 h1.52 r270; Top Overlay "2" at 124.358,91.186 h1.52 r270; Top Overlay "3" at 121.183,80.772 h1.52 r270; Top Overlay "6" at 124.358,80.772 h1.52 r270
NRF24L01: Top Overlay "8" at 93.472,77.318 h1.52 r180; Top Overlay "7" at 92.837,80.112 h1.52 r180; Top Overlay "2" at 105.918,77.191 h1.52 r180; Top Overlay "1" at 105.264,80.227 h1.52 r180